# EAGLE board SkateMate_Glove_Extern (EAGLE 8.1.0)
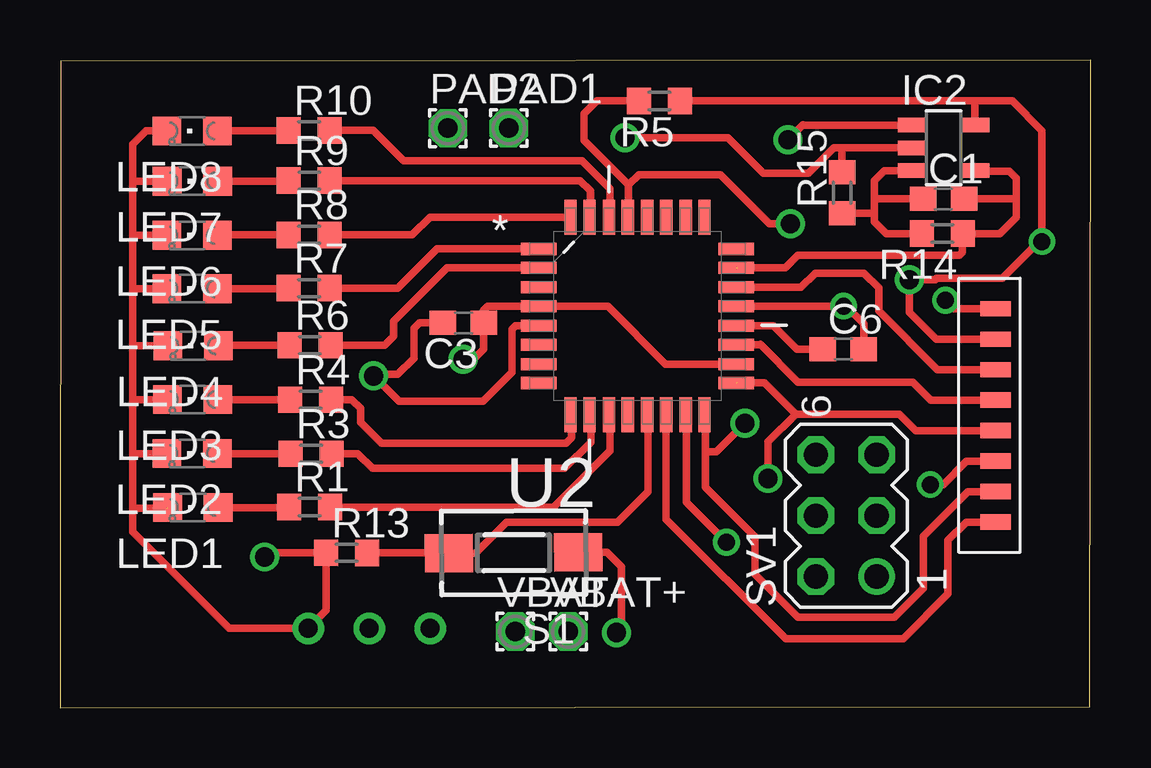
[diagram p0: board, top side]
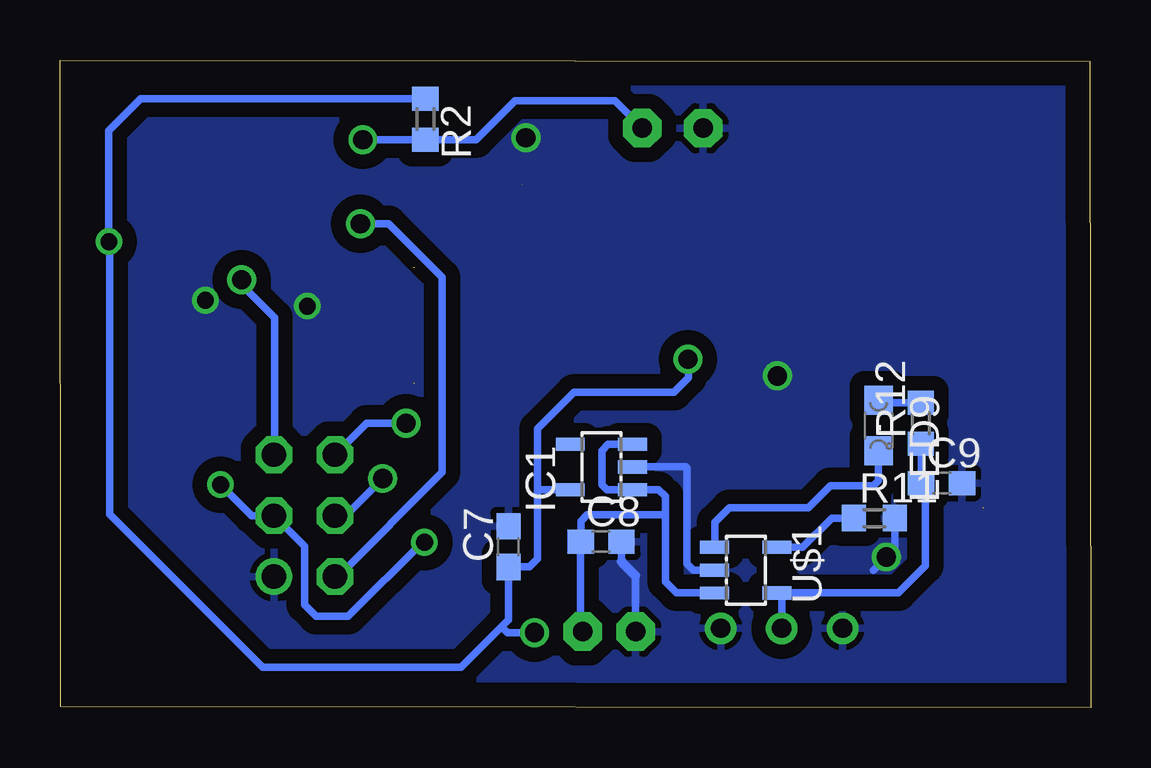
[diagram p1: board, bottom side, seen from below]

Size 42.97 x 27 mm. Coordinates in mm from the lower left corner, seen from the top.
Outline: 0,0 42.93,0.06 42.97,27 0.04,26.94 0,0
Copper layers (1*16): Top 0.035mm / dielectric 1.5mm / Bottom 0.035mm
Design rules "default": minimum track width 10mil, minimum drill 24mil, track to track 8mil, track to pad 8mil, pad to pad 8mil, via to via 8mil, smd to smd 8mil, copper to edge 40mil, drill to drill 8mil, minimum pad ring 10mil, minimum via ring 8mil, stop-mask expansion 4mil, vias tented up to drill 0mil, thermal gap 10mil

## Footprints (pad centres in the part's own frame; a part is rotated, then mirrored left to right if it is on the bottom)
C0603 = smd 1.1 x 1: 1 -0.85,0; 2 0.85,0
SOT23-5 = smd 0.55 x 1.2: 1 -0.95,-1.3; 2 0,-1.3; 3 0.95,-1.3; 4 0.95,1.3; 5 -0.95,1.3
SOT23-5' = smd 0.6 x 1.2: 1 -0.95,-1.306; 2 0,-1.306; 3 0.95,-1.306; 4 0.95,1.306; 5 -0.95,1.306
CHIPLED_0805 = smd 1.2 x 1.2: A 0,-1.05; C 0,1.05
1,6/0,8 = drill 0.813 pad 1.6 octagon: 1 0,0
R0603 = smd 1 x 1.1: 1 -0.85,0; 2 0.85,0
DTSM-3 = smd 2 x 1.6: 1 -2.7,0; 2 2.7,0
MA03-2 = drill 1.016: 1 -2.54,-1.27 | drill 1.016 octagon: 2 -2.54,1.27; 3 0,-1.27; 4 0,1.27; 5 2.54,-1.27; 6 2.54,1.27
QFP80P900X900X120-32N = smd 1.473 x 0.508: 1 -4.115,2.794; 2 -4.115,2.007; 3 -4.115,1.194; 4 -4.115,0.406; 5 -4.115,-0.406; 6 -4.115,-1.194; 7 -4.115,-2.007; 8 -4.115,-2.794; 17 4.115,-2.794; 18 4.115,-2.007; 19 4.115,-1.194; 20 4.115,-0.406; 21 4.115,0.406; 22 4.115,1.194; 23 4.115,2.007; 24 4.115,2.794 | smd 0.508 x 1.473: 9 -2.794,-4.115; 10 -2.007,-4.115; 11 -1.194,-4.115; 12 -0.406,-4.115; 13 0.406,-4.115; 14 1.194,-4.115; 15 2.007,-4.115; 16 2.794,-4.115; 25 2.794,4.115; 26 2.007,4.115; 27 1.194,4.115; 28 0.406,4.115; 29 -0.406,4.115; 30 -1.194,4.115; 31 -2.007,4.115; 32 -2.794,4.115
SOT23-5L = smd 0.533 x 1.2: 1 -0.95,-1.3; 2 0,-1.3; 3 0.95,-1.3 | smd 0.55 x 1.2: 4 0.95,1.3; 5 -0.95,1.3
HEADER1,27 = smd 1.27 x 0.635: 1 -1.016,4.445; 2 -1.016,3.175; 3 -1.016,1.905; 4 -1.016,0.635; 5 -1.016,-0.635; 6 -1.016,-1.905; 7 -1.016,-3.175; 8 -1.016,-4.445
3PINHEADER = drill 0.8: P$1 0,0; P$2 0,2.54; P$3 0,-2.54

## Placement (x,y rotation side)
C1  .47u  [C0603]  36.83,21.21 0 top
C3  100n  [C0603]  16.81,16.05 180 top
C6  100n  [C0603]  32.65,14.95 0 top
C7  .47u  [C0603]  24.28,6.72 90 bottom
C8  .47u  [C0603]  20.42,6.92 0 bottom
C9  4.7u  [C0603]  6.22,9.37 0 bottom
IC1  BU33TD3WG  [SOT23-5]  20.41,10.04 90 bottom
IC2  LMV321M5  [SOT23-5']  36.83,23.34 270 top
LED1  Red  [CHIPLED_0805]  5.54,8.35 90 top
LED2  RED  [CHIPLED_0805]  5.51,10.6 90 top
LED3  RED  [CHIPLED_0805]  5.53,12.85 90 top
LED4  RED  [CHIPLED_0805]  5.55,15.09 90 top
LED5  RED  [CHIPLED_0805]  5.51,17.47 90 top
LED6  RED  [CHIPLED_0805]  5.51,19.69 90 top
LED7  RED  [CHIPLED_0805]  5.52,21.95 90 top
LED8  RED  [CHIPLED_0805]  5.51,24.04 90 top
LED9  Red  [CHIPLED_0805]  8.85,11.77 180 bottom
PAD1  -  [1,6/0,8]  18.71,24.16 0 top
PAD2  +  [1,6/0,8]  16.17,24.15 0 top
R1  150  [R0603]  10.41,8.37 0 top
R2  10k  [R0603]  27.74,24.53 270 bottom
R3  150  [R0603]  10.47,10.59 0 top
R4  150  [R0603]  10.45,12.84 0 top
R5  10k  [R0603]  24.99,25.29 180 top
R6  150  [R0603]  10.42,15.11 0 top
R7  150  [R0603]  10.38,17.49 0 top
R8  150  [R0603]  10.38,19.71 0 top
R9  150  [R0603]  10.39,21.97 0 top
R10  150  [R0603]  10.38,24.06 0 top
R11  2k  [R0603]  9.03,7.91 0 bottom
R12  330  [R0603]  7.09,11.86 90 bottom
R13  10k  [R0603]  11.95,6.46 359.7 top
R14  10k  [R0603]  36.78,19.77 180 top
R15  10k  [R0603]  32.6,21.47 90 top
S1  DTSM-3  [DTSM-3]  18.91,6.47 180.3 top
SV1  ICSP  [MA03-2]  32.78,8.01 90 top
U2  ATMEGA328PB-AU  [QFP80P900X900X120-32N]  24.07,16.33 0 top
U$1  MCP73831  [SOT23-5L]  14.39,5.74 270 bottom
U$2  HEADER1,27  [HEADER1,27]  40.01,12.19 0 top
U$3  3PINHEADER  [3PINHEADER]  12.89,3.32 90 top
VBAT+  +  [1,6/0,8]  21.18,3.18 0 top
VBAT-  -  [1,6/0,8]  18.98,3.18 0 top

## Library data of the parts
C1 C3 C6-C9 = eagle-ltspice; SPICEMODEL: NONE; SPICEPREFIX: C
IC1 = BU33TD3WG; OC_FARNELL: unknown; OC_NEWARK: unknown
IC2 = linear
LED1-LED9 = led
PAD1 PAD2 VBAT+ VBAT- = wirepad
R1-R15 = eagle-ltspice; SPICEMODEL: NONE; SPICEPREFIX: R
S1 = switch-tact
SV1 = con-lstb; OC_FARNELL: unknown; OC_NEWARK: unknown
U2 = Atmel_By_element14_Batch_1-00; MPN: ATMEGA328P-AU; OC_FARNELL: 1715486; OC_NEWARK: 14R4631; PACKAGE: TQFP-32; SUPPLIER: Atmel
U$1 = MCP73831
U$2 U$3 = SkateMateMagicGlove

## Nets
+3V3: C3.1 C7.1 IC1.5 IC2.5 R2.1 R5.1 S1.1 SV1.5 U2.4 U2.18 U$2.2
CE: U2.22 U$2.3
CSN: U2.19 U$2.4
GND: C3.2 C6.2 C7.2 C8.2 C9.2 IC1.2 IC2.2 LED1.C LED2.C LED3.C LED4.C LED5.C LED6.C LED7.C LED8.C PAD2.1 R11.2 R13.1 R15.2 SV1.1 U2.5 U2.21 U$1.2 U$2.1 U$3.P$2 U$3.P$3 VBAT-.1
IRQ: U2.14 U$2.8
MISO: SV1.6 U2.16 U$2.7
MOSI: SV1.3 U2.15 U$2.6
N$1: LED1.A R1.1
N$2: LED2.A R3.1
N$3: R13.2 S1.2 U2.13
N$4: C6.1 U2.20
N$5: C1.1 IC2.3 R14.2 R15.1
N$6: LED3.A R4.1
N$7: LED6.A R8.1
N$8: LED7.A R9.1
N$9: LED8.A R10.1
N$10: LED4.A R6.1
N$11: LED5.A R7.1
N$12: R1.2 U2.11
N$13: R3.2 U2.10
N$14: C1.2 IC2.4 R14.1 U2.23
N$15: R4.2 U2.9
N$16: R6.2 U2.2
N$17: R7.2 U2.1
N$18: R8.2 U2.32
N$19: R9.2 U2.31
N$20: R10.2 U2.30
N$21: C8.1 IC1.1 IC1.3 U$1.3 VBAT+.1
N$22: LED9.A R12.2
N$23: LED9.C U$1.1
N$24: C9.1 R12.1 U$1.4 U$3.P$1
N$25: R11.1 U$1.5
N$26: IC2.1 PAD1.1 R2.2
RESETICSP: R5.2 SV1.2 U2.29
SCK: SV1.4 U2.17 U$2.5

## Tracks (layer width: path | path; a pad name or v marks a point on that pad's centre or on a via)
+3V3  (via drill 0.7 pad 0.81, 0.8 pad 0.61, 0.8 pad 0.81)  (1 unrouted)
  Top 0.305: 25.85,25.3 R5.1 38.21,25.29 | IC2.5 38.14,25.22 38.21,25.29 | U$2.2 36.53,15.37 35.4,16.49 v35.4,17.85 36.49,17.85 36.53,17.89 39.28,17.89 40.93,19.55 40.93,24.06 39.7,25.29 38.21,25.29 | S1.1 22.79,6.48 23.4,5.88 23.4,3.35 v23.19,3.14 | 19.95,16.73 U2.4 | U2.18 25.24,14.33 22.84,16.74 U2.4 | v16.8,14.53 17.24,14.53 17.66,14.95 C3.1 17.66,16.58 17.82,16.74 U2.4
  Bottom 0.305: C7.1 23.4,5.88 23.06,6.21 23.06,9.19 | C7.1 | C7.1 | 23.06,9.19 23.06,11.63 21.54,13.16 17.38,13.16 16.77,13.76 16.77,14.5 v16.8,14.53 | IC1.5 22.96,9.09 23.06,9.19 | 24.29,5.86 C7.1 | C7.1 24.28,3.68 24.56,3.39 | 24.56,3.39 26.25,1.7 34.53,1.7 40.89,8.06 40.89,19.39 v40.93,19.43 40.93,24.05 39.6,25.38 R2.1 | SV1.5 34.03,10.57 34.03,16.26 35.4,17.63 v35.4,17.85 | v23.19,3.14 24.31,3.14 24.56,3.39
CE
  Top 0.305: U$2.3 36.58,14.1 34.13,16.54 34.13,17.5 33.51,18.12 31.48,18.12 30.89,17.52 U2.22
CSN
  Top 0.305: U$2.4 36.3,12.83 35.55,13.57 30.77,13.57 29.2,15.14 29.19,15.14 U2.19
GND  (via drill 0.7, 0.7 pad 0.81, 0.8 pad 0.61, 0.8 pad 0.81)  (1 unrouted)
  Top 0.305: 4.46,8.32 3.02,8.32 | 8.42,6.18 v8.53,6.29 8.7,6.46 R13.1 11.1,4.07 U$3.P$2 7.05,3.32 3.02,7.34 3.02,8.32 | IC2.2 32.6,23.34 | 32.6,23.34 32.27,23.34 32.26,23.34 31.21,22.29 29.31,22.29 27.84,23.76 v23.55,23.76 | U$2.1 37.26,16.64 v36.91,16.99 | LED8.C 3.58,24.04 3.02,23.48 3.02,21.95 | 3.02,10.48 3.02,8.32 | 3.02,12.85 3.02,14.98 | 3.02,12.85 3.02,10.48 | 3.02,17.47 3.02,14.98 | 3.02,19.69 3.02,17.47 | 3.02,21.95 3.02,19.69 | LED2.C 3.14,10.6 3.02,10.48 | 3.02,14.98 3.13,15.09 LED4.C | LED3.C 3.02,12.85 | LED5.C 3.02,17.47 | LED6.C 3.02,19.69 | LED7.C 3.02,21.95 | 32.6,23.34 R15.2 | U2.5 19,15.92 18.85,15.78 18.85,13.99 17.63,12.77 14.14,12.77 v13.07,13.84 13.14,13.9 14.07,13.9 14.75,14.58 14.75,15.82 14.98,16.05 C3.2 | 28.2,16.75 U2.21 v32.66,16.74 32.76,16.74 33.5,16 C6.2
  Bottom 0.305: R11.2 8.18,6.64 v8.53,6.29 9.08,5.74 | IC1.2 16.89,10.04 16.84,9.99 16.84,6 16.58,5.74 U$1.2 | C8.2 19.57,6.09 | 18.98,5.51 VBAT-.1
  Bottom 0.406: 19.57,6.09 18.98,5.51
  pour Bottom (isolate 0.61): -0.19,26.69 42.05,26.58 41.91,0.29 -0.33,0.4
IRQ
  Top 0.305: U$2.8 37.78,7.75 37.02,6.98 37.02,4.75 35.16,2.89 30.25,2.89 25.27,7.87 U2.14
MISO  (via drill 0.8 pad 0.61)
  Top 0.305: U$2.7 37.84,9.01 36.65,7.82 35.98,7.14 35.98,4.98 34.79,3.78 30.76,3.78 28.97,5.57 28.97,7.12 26.9,9.19 26.9,10.68 | 26.93,10.71 26.9,10.68 | 26.9,10.68 27.37,10.68 v28.55,11.86 | 26.9,10.68 26.9,12.18 U2.16
  Bottom 0.305: 31.35,10.71 SV1.6 30.2,11.86 v28.55,11.86
MOSI  (via drill 0.7 pad 0.81)
  Top 0.305: v36.28,9.3 36.81,9.3 37.78,10.28 38.99,10.28 U$2.6 | v27.78,6.9 26.12,8.57 26.12,12.18 U2.15
  Bottom 0.305: v36.28,9.3 34.98,8.01 SV1.3 32.77,6.73 32.77,4.29 32.3,3.82 30.95,3.82 27.87,6.9 v27.78,6.9
N$1
  Top 0.305: LED1.A 9.54,8.35 R1.1
N$2
  Top 0.305: R3.1 LED2.A
N$3
  Top 0.305: R13.2 S1.2 17.32,6.45 18.61,7.74 23.25,7.74 24.52,9.01 24.52,12.22 24.51,12.21 U2.13
N$4
  Top 0.305: 28.2,15.93 U2.20 29.74,15.92 30.71,14.95 C6.1
N$5
  Top 0.305: R14.2 34.45,19.77 33.95,20.26 33.95,20.58 | 33.95,20.58 33.95,21.31 | 33.95,21.31 33.95,21.97 34.37,22.39 IC2.3 | C1.1 34.06,21.21 33.95,21.31 | R15.1 33.91,20.62 33.95,20.58
N$6
  Top 0.305: LED3.A 9.59,12.85 R4.1
N$7
  Top 0.305: R8.1 6.58,19.71 LED6.A
N$8
  Top 0.305: LED7.A 9.52,21.95 R9.1
N$9
  Top 0.305: 6.58,24.06 LED8.A 9.51,24.04 R10.1
N$10
  Top 0.305: R6.1 6.62,15.11 LED4.A
N$11
  Top 0.305: LED5.A 9.51,17.47 R7.1
N$12
  Top 0.305: R1.2 20.56,8.37 22.92,10.72 22.92,12.18 U2.11
N$13
  Top 0.305: 22.13,11.39 22.13,11.07 21.04,9.98 13.02,9.98 12.41,10.59 R3.2 | 22.13,11.39 22.13,12.2 | 22.13,11.39 22.13,12.15 U2.10
N$14  (1 unrouted)
  Top 0.305: 38.15,22.38 IC2.4 38.16,22.37 39.56,22.37 39.86,22.07 39.86,21.21 | 39.86,21.21 39.86,20.45 39.18,19.77 R14.1 37.48,19.77 37.34,19.62 37.62,19.34 37.62,18.99 37.5,18.86 30.76,18.86 30.23,18.34 28.23,18.34 | C1.2 39.86,21.21
N$15
  Top 0.305: R4.2 12.16,12.84 12.52,12.48 12.52,11.9 13.4,11.03 21.1,11.03 21.32,11.25 21.32,12.22 21.31,12.21 U2.9
N$16
  Top 0.305: R6.2 13.53,15.11 13.9,15.48 13.9,16.11 16.14,18.34 U2.2
N$17
  Top 0.305: R7.2 14.08,17.49 15.72,19.13 19.96,19.13 U2.1
N$18
  Top 0.305: R8.2 14.68,19.71 15.42,20.45 21.27,20.45 U2.32
N$19
  Top 0.305: R9.2 21.69,21.97 22.11,21.55 22.11,20.46 22.1,20.45 U2.31
N$20
  Top 0.305: R10.2 13.05,24.06 14.32,22.79 21.76,22.79 22.92,21.63 22.92,20.48 U2.30
N$21
  Bottom 0.305: 17.85,8.05 17.86,8.04 | IC1.1 | U$1.3 17.27,4.79 17.74,5.26 17.74,5.91 | 17.74,5.91 17.74,5.92 | 17.74,5.91 17.74,8.16 | IC1.1 18.02,9.1 17.74,8.81 17.74,8.16 | IC1.1 20.18,9.09 20.39,9.3 20.39,10.72 20.13,10.99 IC1.3 | 17.85,8.05 21,8.05 21.26,7.79 C8.1 21.27,3.27 VBAT+.1 | 17.74,8.16 17.85,8.05
N$22
  Bottom 0.305: R12.2 8.74,12.71 LED9.A
N$23
  Bottom 0.305: U$1.1 15.68,7.73 15.07,8.34 11.77,8.34 10.85,9.26 9.07,9.26 8.86,9.47 8.86,10.71 LED9.C
N$24
  Bottom 0.305: U$3.P$1 12.89,4.59 U$1.4 13.07,4.81 8.03,4.81 6.9,5.94 6.9,9.2 C9.1 7.07,11 R12.1
N$25
  Bottom 0.305: U$1.5 12.02,6.69 10.8,7.91 R11.1
N$26  (via drill 0.8 pad 0.81)
  Top 0.305: v30.35,23.68 30.97,24.29 IC2.1
  Bottom 0.305: 18.73,24.18 PAD1.1 19.85,25.3 24.01,25.3 25.62,23.68 R2.2 | 27.73,23.7 R2.2 | v30.35,23.68 R2.2
RESETICSP  (via drill 0.8 pad 0.81)  (1 unrouted)
  Top 0.305: 24.16,25.26 R5.2 22.38,25.3 21.84,24.75 21.84,23.66 23.7,21.79 | 23.7,21.79 | 23.7,21.79 24.14,22.22 27.53,22.22 29.57,20.18 v30.45,20.18 | 23.7,21.79 | 23.7,21.79 23.7,20.48 U2.29
  Bottom 0.305: SV1.2 31.39,5.47 27.04,9.82 27.04,17.94 29.28,20.18 v30.45,20.18
SCK  (via drill 0.8 pad 0.61)  (1 unrouted)
  Top 0.305: 30.22,12.69 29.37,13.54 28.23,13.54 | 30.22,12.69 30.21,12.69 | 29.5,9.57 v29.52,9.56 29.52,11.09 30.67,12.24 | 30.67,12.24 30.22,12.69 | U$2.5 35.69,11.56 35,12.24 30.67,12.24
  Bottom 0.305: SV1.4 31.07,8.01 v29.52,9.56